# EAGLE board single_trigger_in_board (EAGLE 9.5.1)
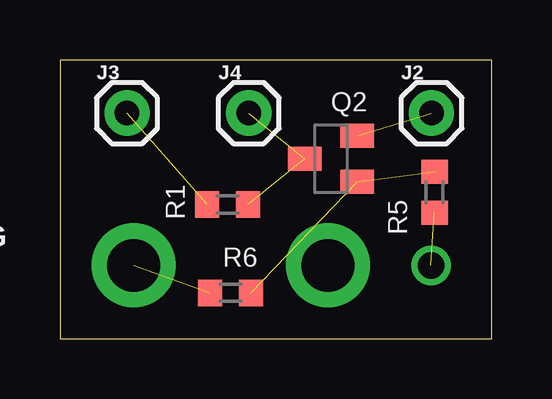
[diagram p0: board, top side]
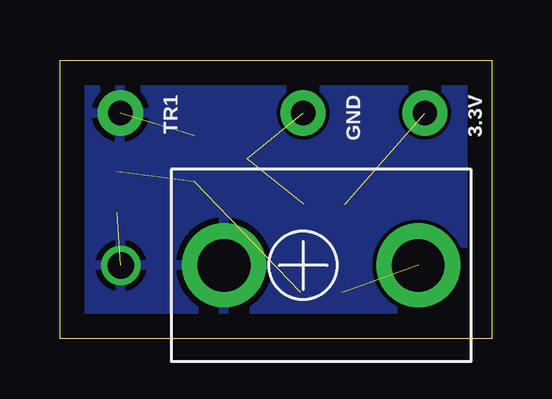
[diagram p1: board, bottom side, seen from below]

Size 18.01 x 11.61 mm. Coordinates in mm from the lower left corner, seen from the top.
Outline: 0,0 18.01,0 18.01,11.61 0,11.61 0,0
Copper layers (1*16): Top 0.035mm / dielectric 1.5mm / Bottom 0.035mm
Design rules "default": minimum track width 6mil, minimum drill 0.35mm, track to track 6mil, track to pad 6mil, pad to pad 6mil, via to via 6mil, smd to smd 6mil, copper to edge 40mil, drill to drill 6mil, minimum pad ring 10mil, minimum via ring 8mil, stop-mask expansion 4mil, vias tented up to drill 0mil, thermal gap 10mil

## Footprints (pad centres in the part's own frame; a part is rotated, then mirrored left to right if it is on the bottom)
1X01 = drill 1.016 pad 1.88: 1 0,0
TRANSISTOR_SOT23-BEC = smd 1 x 1.4: B -0.95,-1.1; C 0,1.1; E 0.95,-1.1
R0603 = smd 1 x 1.1: 1 -0.85,0; 2 0.85,0
KOBICONN_PJM301DM_JACK = drill 2.2 pad 3.5: P$1 0,4.8; P$2 0,-3.3 | drill 1.1: P$3 0,-7.6

## Placement (x,y rotation side)
J2  [1X01]  15.49,9.4 0 top
J3  [1X01]  2.79,9.4 0 top
J4  [1X01]  7.87,9.4 0 top
Q2  MMBT3904LT1G  [TRANSISTOR_SOT23-BEC]  11.3,7.49 90 top
R1  10k  [R0603]  6.99,5.59 180 top
R5  1M  [R0603]  15.62,6.1 270 top
R6  100k  [R0603]  7.11,1.9 180 top
TRIG1  [KOBICONN_PJM301DM_JACK]  7.87,3.05 270 bottom

## Library data of the parts
J2-J4 = SparkFun-Connectors
Q2 = braids_v50
R1 R5 R6 = rcl; SPICEPREFIX: R
TRIG1 = 0000-master

## Nets
3V3_D: J3.1 R1.2
GND: J2.1 Q2.E R5.2 TRIG1.P$2 TRIG1.P$3
N$18: R6.2 TRIG1.P$1
N$19: Q2.B R5.1 R6.1
TR1: J4.1 Q2.C R1.1

## Tracks (layer width: path | path; a pad name or v marks a point on that pad's centre or on a via)
3V3_D  (1 unrouted)
GND  (2 unrouted)
  pour Bottom: 0.13,-2.03 0.13,11.94 18.03,11.94 18.03,-2.03
N$18  (1 unrouted)
N$19  (2 unrouted)
TR1  (2 unrouted)

## Text on the board
tPlace: INPUT / CONDITIONING
bPlace: 3.3V | GND | TR1